# Altium PCB AD8307_Add_on_v3.PcbDoc
Units mm, origin at the board's own origin, x right, y up, seen from the top; angles counter-clockwise.
Board outline 32.33 x 16.57 mm, 2 copper layers (Top Layer, Bottom Layer), stack 0.324 mm thick; 18 components, 14 nets, 50 pads, 9 vias.
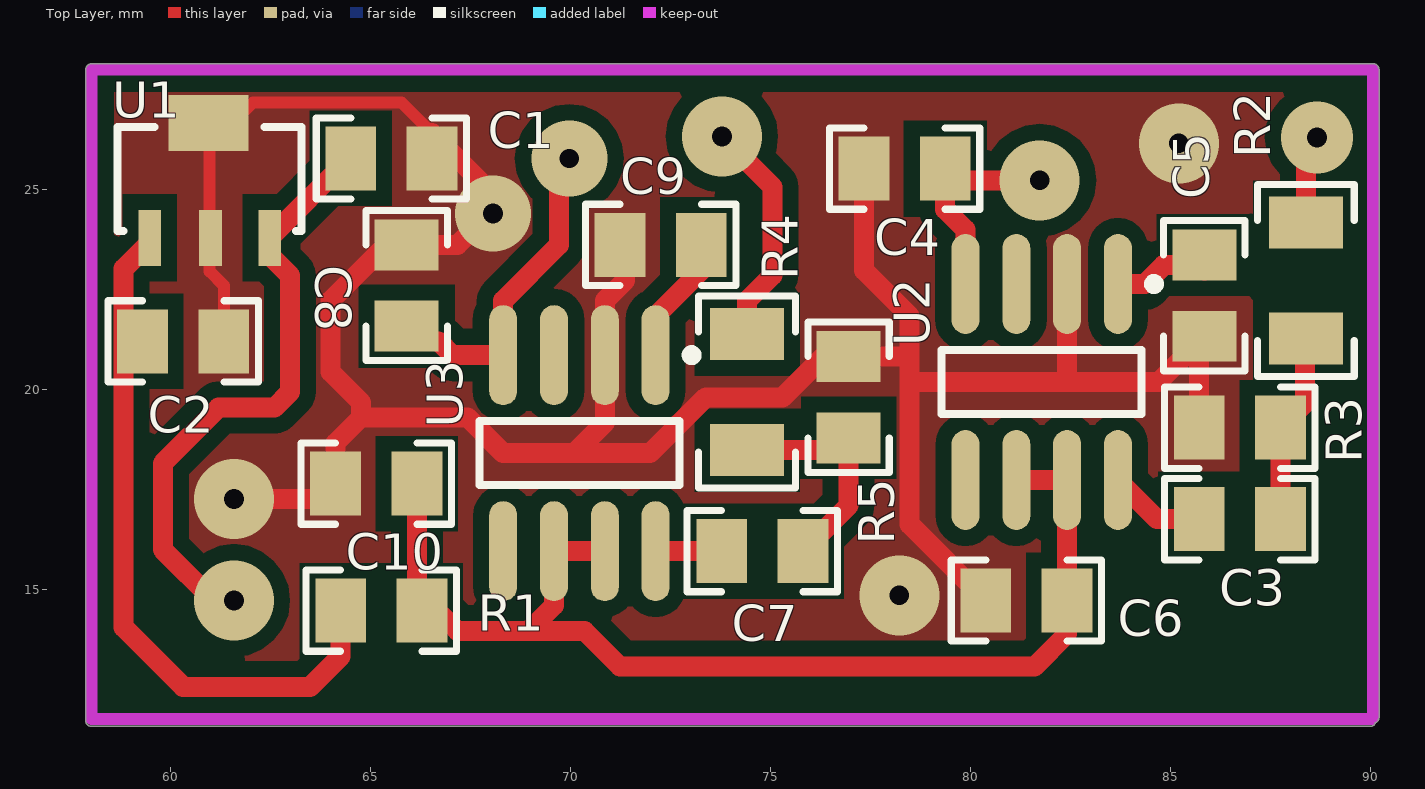
[diagram p0: Top Layer view]
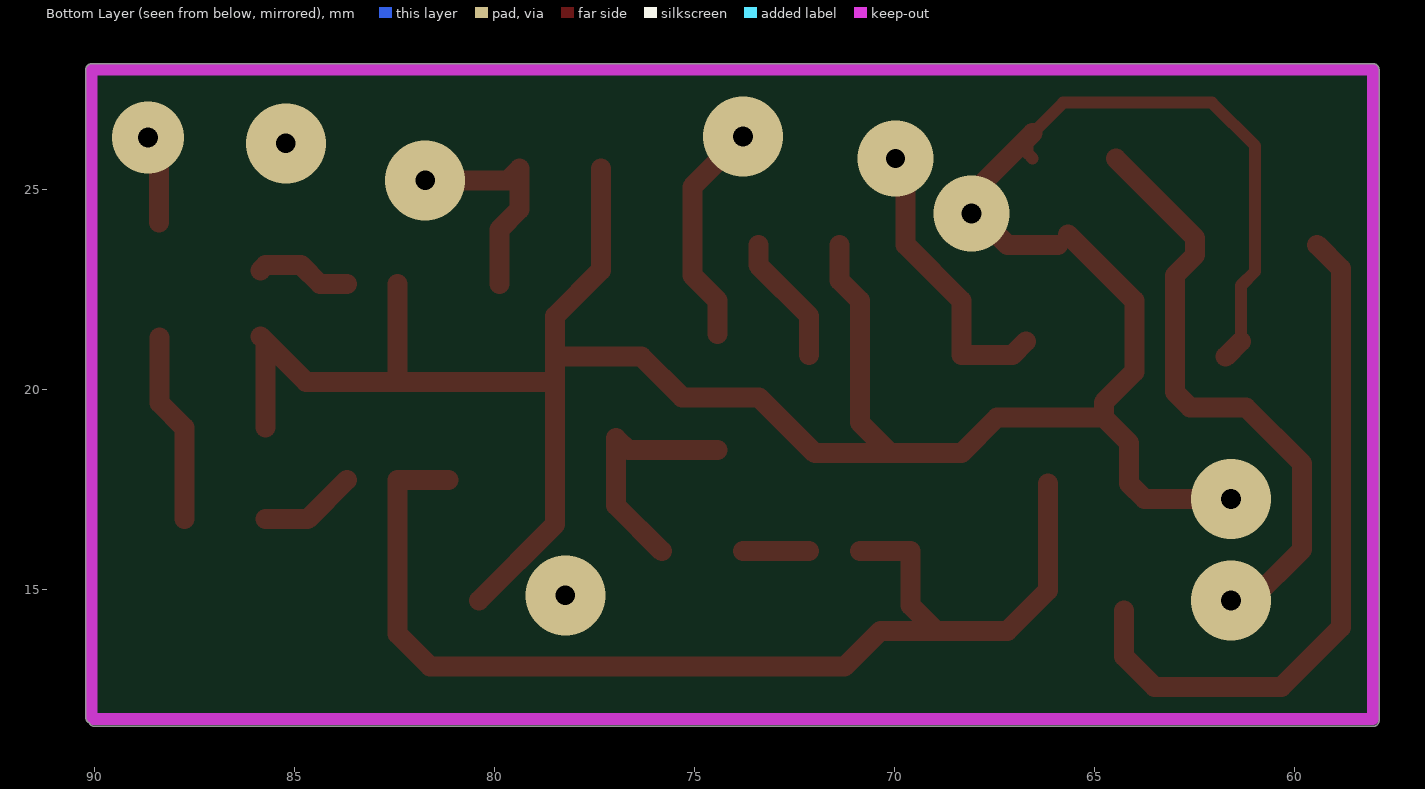
[diagram p1: Bottom Layer view, seen from below]

## Layer stack, top to bottom
Top Layer: signal copper 0.035
Dielectric: core 0.254, FR-4, Dk 4.2
Bottom Layer: signal copper 0.035

## Board outline
57.889,11.732 ccw(c58.039,11.732) 58.039,11.581 89.996,11.581 ccw(c89.996,11.732) 90.135,11.675 ccw(c90.071,11.811) 90.221,11.811 90.221,28 ccw(c90.071,28) 90.071,28.15 58.039,28.15 ccw(c58.039,28) 57.889,28

## Design rules (kind name [scope] priority, off if disabled: settings)
Clearance [All] p1: gap=0.3
HoleSize [All] p1 off: absolutevalues=TRUE maxlimit=2.54 minlimit=0.5 maxpercent=80.000 minpercent=20.000
HoleToHoleClearance [All] p1 off: gap=0.254 allowstackedmicrovias=TRUE
LayerPairs [All] p1 off: enforce=TRUE
MinimumSolderMaskSliver [All] p1 off: minsoldermaskwidth=0.254
NetAntennae [All] p1 off: netantennaetolerance=0
PolygonConnect [All] p1: connectstyle=Direct reliefconductorwidth=0.254 reliefentries=4 polygonreliefangle="90 Angle"
RoutingVias [All] p1: holewidth=0.5 width=0.9 viastyle="Through Hole" minholewidth=0.3 minwidth=0.5 maxholewidth=0.9 maxwidth=2
SilkToSilkClearance [All] p1 off: silktosilkclearance=0.254
SilkscreenOverComponentPads [IsPad] p1 off: minsilkscreentomaskgap=0.254
SolderMaskExpansion [All] p1: expansion=0.102
Width [All] p1: maxlimit=2 minlimit=0.2 preferedwidth=0.35
21 further rules are at their usual default settings.

## Components (designator, comment, footprint, x,y, rotation, side; value= is the part's Value field where it differs from the comment)
C1 "PartNumber" 0805_HV 65.532,25.781 r0 top
C2 "PartNumber" 0805_HV 60.325,21.209 r0 top
C3 "PartNumber" 0805_HV 86.741,16.764 r0 top
C4 "PartNumber" 0805_HV 78.359,25.527 r180 top
C5 "PartNumber" 0805_HV 85.852,22.352 r270 top
C6 "PartNumber" 0805_HV 81.407,14.732 r180 top
C7 "PartNumber" 0805_HV 74.803,15.965 r0 top
C8 "PartNumber" 0805_HV 65.913,22.606 r90 top
C9 "PartNumber" 0805_HV 72.263,23.622 r180 top
C10 "PartNumber" 0805_HV 65.151,17.653 r180 top
R1 "PartNumber" 0805_HV 65.278,14.478 r180 top
R2 "PartNumber" 1206 88.392,22.733 r270 top
R3 "PartNumber" 0805_HV 86.741,19.05 r0 top
R4 "PartNumber" 1206 74.422,19.939 r270 top
R5 "PartNumber" 0805_HV 76.962,19.812 r270 top
U1 "L78L05ACUTR" STMicroelectronics_SOT-89-7098166_MFG 61.087,25.273 r0 top
U2 "AD8307ARZ" ADI-R-8_M 81.788,20.193 r270 top
U3 "AD8307ARZ" ADI-R-8_M 70.231,18.415 r270 top

## Footprints (in the part's own frame and the unit in brackets; to place one, negate y for a bottom-side part, rotate by r counter-clockwise, add the part's x,y. Pads: shape width x height; smd on the part's side, far side on the other; paste and mask are expansions set on the pad)
0805_HV [mil]
  rect 50x63 smd: 1(-40,0) 2(40,0)
  silkscreen extent -74,-40 74,40, body extent -43,-29 43,29, height 57
1206 [mm]
  rect 1.3x1.85 smd: 1(-1.45,0) 2(1.45,0)
  silkscreen extent -2.4,-1.21 2.4,1.21, body extent -1.7,-0.9 1.7,0.9, height 1.35
ADI-R-8_M [mm] "SOIC, 8-Leads, Body 4.9x3.9mm, Pitch 1.27mm, IPC Low Density"
  oval 2.5x0.7 smd: 1(-2.45,1.905) 2(-2.45,0.635) 3(-2.45,-0.635) 4(-2.45,-1.905) 5(2.45,-1.905) 6(2.45,-0.635) 7(2.45,0.635) 8(2.45,1.905)
  silkscreen extent -2.57,-2.5 0.8,2.93, body extent -2,-2.5 2,2.5, height 1.75
STMicroelectronics_SOT-89-7098166_MFG [mm]
  rect 0.57x1.4 smd paste+0 mask+0: 1(-1.6,-1.475) 2(-0.076,-1.475) 3(1.4,-1.475)
  rect 2x1.4 smd paste+0 mask+0: 2(-0.127,1.397)
  silkscreen extent -2.4,-1.3 2.2,1.3, body extent -2.5,-2.28 2.3,2.28, height 0.25

## Part data
C1 C2 C3 C4 C5 C6 C7 C8 C9 C10: library part C0805, "CAP, CERM, +/- 10%, X7S,  0805"
R1 R3 R5: library part R0805, "RES, 1%, 0.1 W, 0805"
R2 R4: library part R1206, "RES, 1%, 0.5 W, 1206"
U2 U3: "Low Cost, DC to 500 MHz, 92 dB Logarithmic Amplifier, 400ns Response Time, R-8, Pb-Free, 98 Tube"

## Via types
v1: diameter 2, hole 0.486, Top Layer to Bottom Layer, tented both sides, 3 vias
v2: diameter 2, hole 0.5, Top Layer to Bottom Layer, 3 vias
v3: diameter 1.8, hole 0.5, Top Layer to Bottom Layer, 1 vias
v4: diameter 1.9, hole 0.5, Top Layer to Bottom Layer, 1 vias
v5: diameter 1.9, hole 0.486, Top Layer to Bottom Layer, tented both sides, 1 vias

## Nets (pads, with @x,y where several pads share a name; then routed paths per layer and width w, separated by ;. In a path a pad name is that pad's centre, name@x,y a point inside that pad or via, vN(x,y) a via of type N, cw(c..) or ccw(c..) an arc to the next point about the centre after c; other vN are vias at no path point)
GND: C1.2 C2.2 C4.2 C5.2 C6.2 C8.2 C9.2 C10.2 R3.1 R5.1 U1.2 U2.2 U3.2 | length 73
  Top Layer w0.3: C2.2@61.341,21.082 61.341,22.606 60.987,22.96 60.987,26.098 62.067,27.178 65.786,27.178 66.675,26.289 66.675,25.908 C1.2
  Top Layer w0.5: C2.2 C2.2@61.722,20.828 ; v2(61.595,17.272) 63.754,17.272 C10.2 64.135,18.669 64.77,19.304 ; C8.2@65.659,23.876 64.008,22.225 64.008,20.447 64.77,19.685 64.77,19.304 ; C8.2 67.183,23.622 v4@68.072,24.511 ; C1.2@66.548,26.416 v4@68.072,24.892 ; C9.2@71.374,23.622 71.374,22.733 70.866,22.225 U3.2 70.866,19.177 70.104,18.415 ; C4.2 77.343,22.987 78.486,21.844 78.486,20.828 ; C6.2 78.486,16.637 78.486,20.193 ; U2.2 82.423,20.193 ; R3.1 C5.2@85.725,21.209 ; C5.2 C5.2@85.725,21.209 ; 64.77,19.304 67.437,19.304 68.326,18.415 70.104,18.415 ; 70.104,18.415 71.995,18.415 73.392,19.812 75.311,19.812 76.327,20.828 R5.1 78.486,20.828 ; 78.486,20.193 82.423,20.193 ; 78.486,20.193 78.486,20.828 ; 82.423,20.193 84.709,20.193 C5.2@85.725,21.209
  other v1: 78.232,14.859 85.217,26.162
  other v4: 68.075,24.409
Log_P_Forward: C4.1 U2.4 | length 5.6
  Top Layer w0.5: U2.4 79.883,24.003 79.375,24.511 C4.1 79.669,25.233 v1(81.738,25.233)
Log_P_Reverse: C8.1 U3.4 | length 7.4
  Top Layer w0.5: C8.1@66.712,21.209 67.056,20.865 U3.4 68.326,22.225 69.723,23.622 69.723,25.527 v5(69.977,25.781)
NetC2_1: C2.1 R1.2 U1.1 | length 17.3
  Top Layer w0.5: U1.1@59.436,23.622 58.839,23.025 58.839,14.059 60.325,12.573 63.5,12.573 64.262,13.335 R1.2
NetC3_1: C3.1 U2.8 | length 2.4
  Top Layer w0.5: U2.8 84.672,16.764 C3.1
NetC3_2: C3.2 R2.2 R3.2 | length 4.8
  Top Layer w0.5: C3.2 R3.2 88.374,19.667 R2.2@88.374,21.301
NetC5_1: C5.1 U2.1 | length 2.4
  Top Layer w0.5: U2.1 84.365,22.643 84.836,23.114 85.725,23.114 C5.1@85.852,22.987
NetC7_1: C7.1 U3.8 | length 1.7
  Top Layer w0.5: U3.8 C7.1
NetC7_2: C7.2 R4.2 R5.2 | length 6
  Top Layer w0.5: R4.2 76.655,18.489 R5.2 76.962,17.108 C7.2
NetC9_1: C9.1 U3.1 | length 3.3
  Top Layer w0.5: U3.1 72.136,21.844 73.406,23.114 C9.1@73.406,23.622
P_Forward: R2.1 | length 2.2
  Top Layer w0.5: R2.1 88.392,26.03 v3(88.669,26.306)
P_Reverse: R4.1 | length 5.7
  Top Layer w0.5: v2(73.794,26.337) 75.057,25.074 75.057,22.86 74.422,22.225 R4.1
Vcc: C6.1 C10.1 R1.1 U2.6 U2.7 U3.6 U3.7 | length 28.9
  Top Layer w0.5: C10.1 66.167,14.986 67.183,13.97 68.961,13.97 ; 69.088,14.097 68.961,13.97 ; U3.7 U3.6 69.596,14.605 68.961,13.97 ; U2.6 U2.7 C6.1 82.423,13.893 81.611,13.081 71.247,13.081 70.358,13.97 68.961,13.97
VIN: C1.1 U1.3 | length 15.3
  Top Layer w0.5: v2(61.595,14.732) 61.087,14.732 59.817,16.002 59.817,18.161 61.214,19.558 62.611,19.558 62.992,19.939 62.992,22.86 U1.3@62.487,23.365 ; U1.3@62.484,23.368 U1.3@62.487,23.365 ; C1.1@64.47,25.781 U1.3 U1.3@62.487,23.365
pads on no net: U2.3 U2.5 U3.3 U3.5

## Polygon pours and split planes (outlines as drawn)
GND on Top Layer "TOPLayer-No Net" (solid, remove dead copper): 58.039,27.94 57.912,27.813 57.912,11.684 90.043,11.684 90.043,27.94 58.166,27.94

## Keep-outs
Keep-Out Layer:
  lines w0.3: 58.039,11.771 58.039,28 90.071,28 90.071,11.811 90.075,11.811 90.035,11.771 58.039,11.771